# Altium PCB EHR.PcbDoc (part 1 of 4)
Units mm, origin at the board's own origin, x right, y up, seen from the top; angles counter-clockwise.
Board outline 200 x 110 mm, 2 copper layers (Top Layer, Bottom Layer), stack 1.646 mm thick; 17 components, 171 nets, 955 pads, 288 vias.
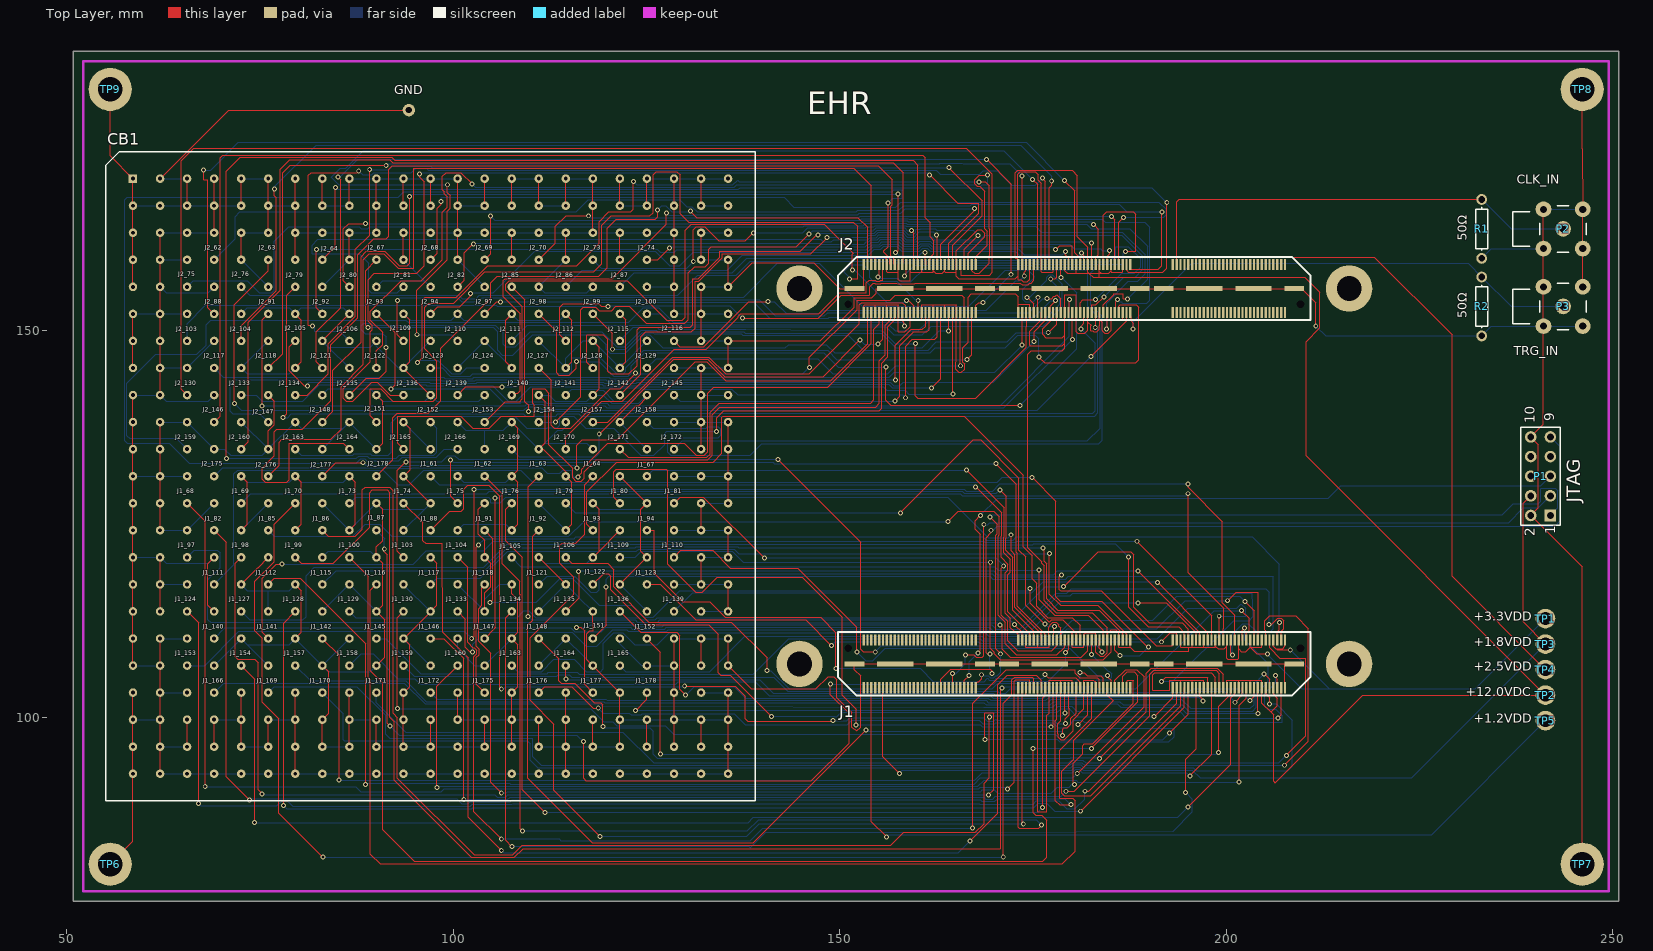
[diagram p0: Top Layer view]
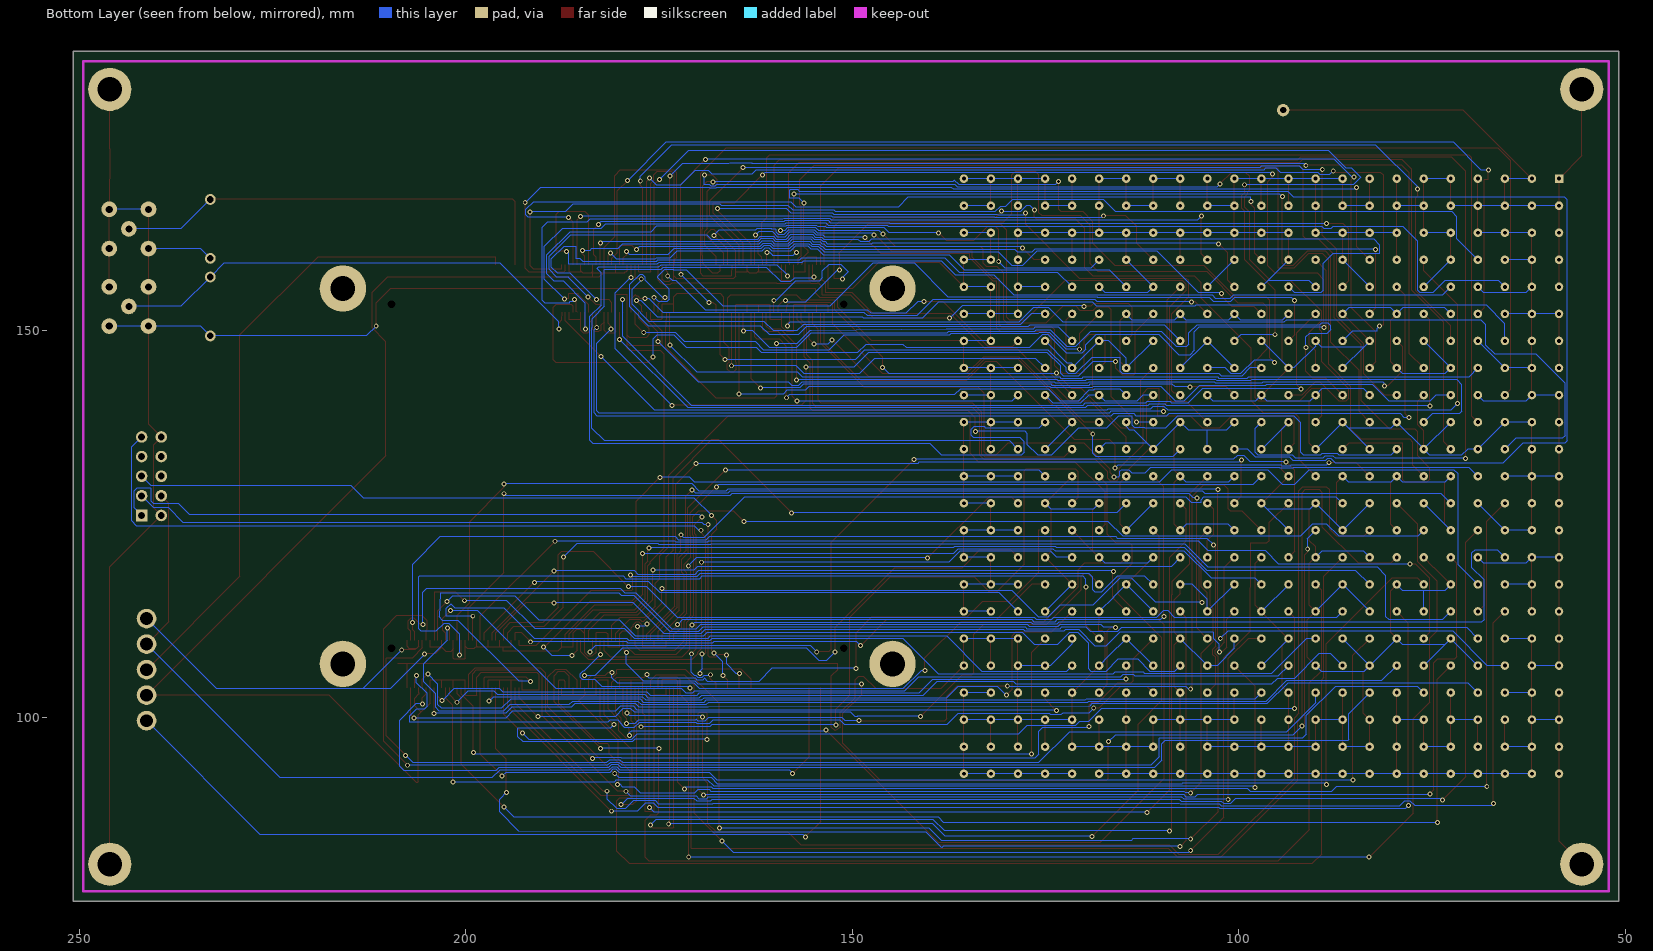
[diagram p1: Bottom Layer view, seen from below]

## Layer stack, top to bottom
Top Solder: solder mask 0.0102, Solder Resist, Dk 3.5
Top Layer: signal copper 0.0356
Dielectric 1: core 1.5748, FR-4, Dk 4.8
Bottom Layer: signal copper 0.0356
Bottom Solder: solder mask 0.0102, Solder Resist, Dk 3.5

## Board outline
50.8,76.2 250.8,76.2 250.8,186.2 50.8,186.2

## Design rules (kind name [scope] priority, off if disabled: settings)
Clearance [All] p1: gap=0.15
HoleSize [All] p1: absolutevalues=TRUE maxlimit=3.3 minlimit=0.3 maxpercent=80.000 minpercent=20.000
MinimumSolderMaskSliver MinimumSolderMaskSliver_QTH [HasFootprint('QTH-090-01-X-D-A') vs HasFootprint('QTH-090-01-X-D-A')] p1: minsoldermaskwidth=0.09
MinimumSolderMaskSliver [All] p2: minsoldermaskwidth=0.254
PolygonConnect [All] p1: connectstyle=Relief reliefconductorwidth=0.254 reliefentries=4 polygonreliefangle="90 Angle" airgapwidth=0.254
RoutingVias [All] p1: holewidth=0.39 width=0.64 viastyle="Through Hole" minholewidth=0.254 minwidth=0.508 maxholewidth=0.711 maxwidth=1.27
SilkToSolderMaskClearance SilkToSolderMaskClearance_QTH [HasFootprint('QTH-090-01-X-D-A') vs HasFootprint('QTH-090-01-X-D-A')] p1: minsilkscreentomaskgap=0.16 clearancetoexposedcopper=TRUE
SilkToSolderMaskClearance [IsPad] p2: minsilkscreentomaskgap=0.24 clearancetoexposedcopper=TRUE
SolderMaskExpansion [All] p1: expansion=0.1
UnpouredPolygon [All] p1: allowunpoured=FALSE
Width [All] p1: maxlimit=0.15 minlimit=0.15 preferedwidth=0.15
26 further rules are at their usual default settings.

## Components (designator, comment, footprint, x,y, rotation, side; value= is the part's Value field where it differs from the comment)
CB1 "Cables_529" EHR23x23_MR3.5 58.547,169.7 r0 top
J1 "QTH-090-01-X-D-A" QTH-090-01-X-D-A 180.34,106.915 r0 top
J2 "QTH-090-01-X-D-A" QTH-090-01-X-D-A 180.34,155.485 r180 top
P1 "Header 5X2" HDR2X5 241.935,126.12 r90 top
P2 "LEMO" LEMO_F 243.586,163.195 r0 top
P3 "LEMO" LEMO_F 243.586,153.162 r0 top
R1 "50Ω" AXIAL-0.3 233.045,163.195 r90 top
R2 "50Ω" AXIAL-0.3 233.045,153.162 r90 top
TP1 "Testpoint" Pad_mid 1504.569,1375.029 r0 top
TP2 "Testpoint" Pad_mid 1504.569,1365.123 r0 top
TP3 "Testpoint" Pad_mid 1504.569,1371.727 r0 top
TP4 "Testpoint" Pad_mid 1504.569,1368.425 r0 top
TP5 "Testpoint" Pad_mid 1504.569,1361.821 r0 top
TP6 "Testpoint M3" Testpoint_M3#1 1321.562,1348.486 r0 top
TP7 "Testpoint M3" Testpoint_M3#2 1502.918,1347.216 r0 top
TP8 "Testpoint M3" Testpoint_M3#3 1492.377,1441.958 r0 top
TP9 "Testpoint M3" Testpoint_M3#4 1326.515,1441.958 r0 top

## Footprints (in the part's own frame and the unit in brackets; to place one, negate y for a bottom-side part, rotate by r counter-clockwise, add the part's x,y. Pads: shape width x height; smd on the part's side, far side on the other; paste and mask are expansions set on the pad)
AXIAL-0.3 [mm] "Axial Device, Thru-Hole; 2 Leads; 0.3 in Pin Spacing"
  round 1.4 hole 0.85: 1(-3.81,0) 2(3.81,0)
  silkscreen extent -2.77,-0.76 2.77,0.76
EHR23x23_MR3.5 [mm]
  rect 1.1x1.1 hole 0.5: 1(0,0)
  round 1.1 hole 0.5: 2(3.5,0) 3(7,0) 4(10.5,0) 5(14,0) 6(17.5,0) 7(21,0) 8(24.5,0) 9(28,0) 10(31.5,0) 11(35,0) 12(38.5,0) 13(42,0) 14(45.5,0) 15(49,0) 16(52.5,0) 17(56,0) 18(59.5,0) 19(63,0) 20(66.5,0) 21(70,0) 22(73.5,0) 23(77,0) 24(0,-3.5) 25(3.5,-3.5) 26(7,-3.5) 27(10.5,-3.5) 28(14,-3.5) 29(17.5,-3.5) 30(21,-3.5) 31(24.5,-3.5) 32(28,-3.5) 33(31.5,-3.5) 34(35,-3.5) 35(38.5,-3.5) 36(42,-3.5) 37(45.5,-3.5) 38(49,-3.5) 39(52.5,-3.5) 40(56,-3.5) 41(59.5,-3.5) 42(63,-3.5) 43(66.5,-3.5) 44(70,-3.5) 45(73.5,-3.5) 46(77,-3.5) 47(0,-7) 48(3.5,-7) 49(7,-7) 50(10.5,-7) 51(14,-7) 52(17.5,-7) 53(21,-7) 54(24.5,-7) 55(28,-7) 56(31.5,-7) 57(35,-7) 58(38.5,-7) 59(42,-7) 60(45.5,-7) 61(49,-7) 62(52.5,-7) 63(56,-7) 64(59.5,-7) 65(63,-7) 66(66.5,-7) 67(70,-7) 68(73.5,-7) 69(77,-7) 70(0,-10.5) 71(3.5,-10.5) 72(7,-10.5) 73(10.5,-10.5) 74(14,-10.5) 75(17.5,-10.5) 76(21,-10.5) 77(24.5,-10.5) 78(28,-10.5) 79(31.5,-10.5) 80(35,-10.5) 81(38.5,-10.5) 82(42,-10.5) 83(45.5,-10.5) 84(49,-10.5) 85(52.5,-10.5) 86(56,-10.5) 87(59.5,-10.5) 88(63,-10.5) 89(66.5,-10.5) 90(70,-10.5) 91(73.5,-10.5) 92(77,-10.5) 93(0,-14) 94(3.5,-14) 95(7,-14) 96(10.5,-14) 97(14,-14) 98(17.5,-14) 99(21,-14) 100(24.5,-14) 101(28,-14) 102(31.5,-14) 103(35,-14) 104(38.5,-14) 105(42,-14) 106(45.5,-14) 107(49,-14) 108(52.5,-14) 109(56,-14) 110(59.5,-14) 111(63,-14) 112(66.5,-14) 113(70,-14) 114(73.5,-14) 115(77,-14) 116(0,-17.5) 117(3.5,-17.5) 118(7,-17.5) 119(10.5,-17.5) 120(14,-17.5) 121(17.5,-17.5) 122(21,-17.5) 123(24.5,-17.5) 124(28,-17.5) 125(31.5,-17.5) 126(35,-17.5) 127(38.5,-17.5) 128(42,-17.5) 129(45.5,-17.5) 130(49,-17.5) 131(52.5,-17.5) 132(56,-17.5) 133(59.5,-17.5) 134(63,-17.5) 135(66.5,-17.5) 136(70,-17.5) 137(73.5,-17.5) 138(77,-17.5) 139(0,-21) 140(3.5,-21) 141(7,-21) 142(10.5,-21) 143(14,-21) 144(17.5,-21) 145(21,-21) 146(24.5,-21) 147(28,-21) 148(31.5,-21) 149(35,-21) 150(38.5,-21) 151(42,-21) 152(45.5,-21) 153(49,-21) 154(52.5,-21) 155(56,-21) 156(59.5,-21) 157(63,-21) 158(66.5,-21) 159(70,-21) 160(73.5,-21) 161(77,-21) 162(0,-24.5) 163(3.5,-24.5) 164(7,-24.5) 165(10.5,-24.5) 166(14,-24.5) 167(17.5,-24.5) 168(21,-24.5) 169(24.5,-24.5) 170(28,-24.5) 171(31.5,-24.5) 172(35,-24.5) 173(38.5,-24.5) 174(42,-24.5) 175(45.5,-24.5) 176(49,-24.5) 177(52.5,-24.5) 178(56,-24.5) 179(59.5,-24.5) 180(63,-24.5) 181(66.5,-24.5) 182(70,-24.5) 183(73.5,-24.5) 184(77,-24.5) 185(0,-28) 186(3.5,-28) 187(7,-28) 188(10.5,-28) 189(14,-28) 190(17.5,-28) 191(21,-28) 192(24.5,-28) 193(28,-28) 194(31.5,-28) 195(35,-28) 196(38.5,-28) 197(42,-28) 198(45.5,-28) 199(49,-28) 200(52.5,-28) 201(56,-28) 202(59.5,-28) 203(63,-28) 204(66.5,-28) 205(70,-28) 206(73.5,-28) 207(77,-28) 208(0,-31.5) 209(3.5,-31.5) 210(7,-31.5) 211(10.5,-31.5) 212(14,-31.5) 213(17.5,-31.5) 214(21,-31.5) 215(24.5,-31.5) 216(28,-31.5) 217(31.5,-31.5) 218(35,-31.5) 219(38.5,-31.5) 220(42,-31.5) 221(45.5,-31.5) 222(49,-31.5) 223(52.5,-31.5) 224(56,-31.5) 225(59.5,-31.5) 226(63,-31.5) 227(66.5,-31.5) 228(70,-31.5) 229(73.5,-31.5) 230(77,-31.5) 231(0,-35) 232(3.5,-35) 233(7,-35) 234(10.5,-35) 235(14,-35) 236(17.5,-35) 237(21,-35) 238(24.5,-35) 239(28,-35) 240(31.5,-35) 241(35,-35) 242(38.5,-35) 243(42,-35) 244(45.5,-35) 245(49,-35) 246(52.5,-35) 247(56,-35) 248(59.5,-35) 249(63,-35) 250(66.5,-35) 251(70,-35) 252(73.5,-35) 253(77,-35) 254(0,-38.5) 255(3.5,-38.5) 256(7,-38.5) 257(10.5,-38.5) 258(14,-38.5) 259(17.5,-38.5) 260(21,-38.5) 261(24.5,-38.5) 262(28,-38.5) 263(31.5,-38.5) 264(35,-38.5) 265(38.5,-38.5) 266(42,-38.5) 267(45.5,-38.5) 268(49,-38.5) 269(52.5,-38.5) 270(56,-38.5) 271(59.5,-38.5) 272(63,-38.5) 273(66.5,-38.5) 274(70,-38.5) 275(73.5,-38.5) 276(77,-38.5) 277(0,-42) 278(3.5,-42) 279(7,-42) 280(10.5,-42) 281(14,-42) 282(17.5,-42) 283(21,-42) 284(24.5,-42) 285(28,-42) 286(31.5,-42) 287(35,-42) 288(38.5,-42) 289(42,-42) 290(45.5,-42) 291(49,-42) 292(52.5,-42) 293(56,-42) 294(59.5,-42) 295(63,-42) 296(66.5,-42) 297(70,-42) 298(73.5,-42) 299(77,-42) 300(0,-45.5) 301(3.5,-45.5) 302(7,-45.5) 303(10.5,-45.5) 304(14,-45.5) 305(17.5,-45.5) 306(21,-45.5) 307(24.5,-45.5) 308(28,-45.5) 309(31.5,-45.5) 310(35,-45.5) 311(38.5,-45.5) 312(42,-45.5) 313(45.5,-45.5) 314(49,-45.5) 315(52.5,-45.5) 316(56,-45.5) 317(59.5,-45.5) 318(63,-45.5) 319(66.5,-45.5) 320(70,-45.5) 321(73.5,-45.5) 322(77,-45.5) 323(0,-49) 324(3.5,-49) 325(7,-49) 326(10.5,-49) 327(14,-49) 328(17.5,-49) 329(21,-49) 330(24.5,-49) 331(28,-49) 332(31.5,-49) 333(35,-49) 334(38.5,-49) 335(42,-49) 336(45.5,-49) 337(49,-49) 338(52.5,-49) 339(56,-49) 340(59.5,-49) 341(63,-49) 342(66.5,-49) 343(70,-49) 344(73.5,-49) 345(77,-49) 346(0,-52.5) 347(3.5,-52.5) 348(7,-52.5) 349(10.5,-52.5) 350(14,-52.5) 351(17.5,-52.5) 352(21,-52.5) 353(24.5,-52.5) 354(28,-52.5) 355(31.5,-52.5) 356(35,-52.5) 357(38.5,-52.5) 358(42,-52.5) 359(45.5,-52.5) 360(49,-52.5) 361(52.5,-52.5) 362(56,-52.5) 363(59.5,-52.5) 364(63,-52.5) 365(66.5,-52.5) 366(70,-52.5) 367(73.5,-52.5) 368(77,-52.5) 369(0,-56) 370(3.5,-56) 371(7,-56) 372(10.5,-56) 373(14,-56) 374(17.5,-56) 375(21,-56) 376(24.5,-56) 377(28,-56) 378(31.5,-56) 379(35,-56) 380(38.5,-56) 381(42,-56) 382(45.5,-56) 383(49,-56) 384(52.5,-56) 385(56,-56) 386(59.5,-56) 387(63,-56) 388(66.5,-56) 389(70,-56) 390(73.5,-56) 391(77,-56) 392(0,-59.5) 393(3.5,-59.5) 394(7,-59.5) 395(10.5,-59.5) 396(14,-59.5) 397(17.5,-59.5) 398(21,-59.5) 399(24.5,-59.5) 400(28,-59.5) 401(31.5,-59.5) 402(35,-59.5) 403(38.5,-59.5) 404(42,-59.5) 405(45.5,-59.5) 406(49,-59.5) 407(52.5,-59.5) 408(56,-59.5) 409(59.5,-59.5) 410(63,-59.5) 411(66.5,-59.5) 412(70,-59.5) 413(73.5,-59.5) 414(77,-59.5) 415(0,-63) 416(3.5,-63) 417(7,-63) 418(10.5,-63) 419(14,-63) 420(17.5,-63) 421(21,-63) 422(24.5,-63) 423(28,-63) 424(31.5,-63) 425(35,-63) 426(38.5,-63) 427(42,-63) 428(45.5,-63) 429(49,-63) 430(52.5,-63) 431(56,-63) 432(59.5,-63) 433(63,-63) 434(66.5,-63) 435(70,-63) 436(73.5,-63) 437(77,-63) 438(0,-66.5) 439(3.5,-66.5) 440(7,-66.5) 441(10.5,-66.5) 442(14,-66.5) 443(17.5,-66.5) 444(21,-66.5) 445(24.5,-66.5) 446(28,-66.5) 447(31.5,-66.5) 448(35,-66.5) 449(38.5,-66.5) 450(42,-66.5) 451(45.5,-66.5) 452(49,-66.5) 453(52.5,-66.5) 454(56,-66.5) 455(59.5,-66.5) 456(63,-66.5) 457(66.5,-66.5) 458(70,-66.5) 459(73.5,-66.5) 460(77,-66.5) 461(0,-70) 462(3.5,-70) 463(7,-70) 464(10.5,-70) 465(14,-70) 466(17.5,-70) 467(21,-70) 468(24.5,-70) 469(28,-70) 470(31.5,-70) 471(35,-70) 472(38.5,-70) 473(42,-70) 474(45.5,-70) 475(49,-70) 476(52.5,-70) 477(56,-70) 478(59.5,-70) 479(63,-70) 480(66.5,-70) 481(70,-70) 482(73.5,-70) 483(77,-70) 484(0,-73.5) 485(3.5,-73.5) 486(7,-73.5) 487(10.5,-73.5) 488(14,-73.5) 489(17.5,-73.5) 490(21,-73.5) 491(24.5,-73.5) 492(28,-73.5) 493(31.5,-73.5) 494(35,-73.5) 495(38.5,-73.5) 496(42,-73.5) 497(45.5,-73.5) 498(49,-73.5) 499(52.5,-73.5) 500(56,-73.5) 501(59.5,-73.5) 502(63,-73.5) 503(66.5,-73.5) 504(70,-73.5) 505(73.5,-73.5) 506(77,-73.5) 507(0,-77) 508(3.5,-77) 509(7,-77) 510(10.5,-77) 511(14,-77) 512(17.5,-77) 513(21,-77) 514(24.5,-77) 515(28,-77) 516(31.5,-77) 517(35,-77) 518(38.5,-77) 519(42,-77) 520(45.5,-77) 521(49,-77) 522(52.5,-77) 523(56,-77) 524(59.5,-77) 525(63,-77) 526(66.5,-77) 527(70,-77) 528(73.5,-77) 529(77,-77)
  silkscreen extent -3.5,-80.5 80.5,3.5
HDR2X5 [mm] "Connector; Header; 5x2 Position"
  rect 1.5x1.5 hole 0.9: 1(0,0)
  round 1.5 hole 0.9: 2(0,2.54) 3(2.54,0) 4(2.54,2.54) 5(5.08,0) 6(5.08,2.54) 7(7.62,0) 8(7.62,2.54) 9(10.16,0) 10(10.16,2.54)
  silkscreen extent -1.27,-1.27 11.43,3.81
LEMO_F [mil] "Connector; RF Coaxial, LEMO, Thru-Hole; 5 Position; Right-Angle"
  round 80 hole 36: 1(0,0) 2(-100,-100) 3(100,-100) 4(100,100) 5(-100,100)
  silkscreen extent -256,-118 118,118
Pad_mid [mil]
  round 100 hole 65: 1(-49735,-49695)
QTH-090-01-X-D-A [mil]
  rect 12x57 smd mask+2: 1(-1073.15,121.5) 2(-1073.15,-121.5) 3(-1053.45,121.5) 4(-1053.45,-121.5) 5(-1033.75,121.5) 6(-1033.75,-121.5) 7(-1014.05,121.5) 8(-1014.05,-121.5) 9(-994.35,121.5) 10(-994.35,-121.5) 11(-974.65,121.5) 12(-974.65,-121.5) 13(-954.95,121.5) 14(-954.95,-121.5) 15(-935.25,121.5) 16(-935.25,-121.5) 17(-915.55,121.5) 18(-915.55,-121.5) 19(-895.85,121.5) 20(-895.85,-121.5) 21(-876.15,121.5) 22(-876.15,-121.5) 23(-856.45,121.5) 24(-856.45,-121.5) 25(-836.75,121.5) 26(-836.75,-121.5) 27(-817.05,121.5) 28(-817.05,-121.5) 29(-797.35,121.5) 30(-797.35,-121.5) 31(-777.65,121.5) 32(-777.65,-121.5) 33(-757.95,121.5) 34(-757.95,-121.5) 35(-738.25,121.5) 36(-738.25,-121.5) 37(-718.55,121.5) 38(-718.55,-121.5) 39(-698.85,121.5) 40(-698.85,-121.5) 41(-679.15,121.5) 42(-679.15,-121.5) 43(-659.45,121.5) 44(-659.45,-121.5) 45(-639.75,121.5) 46(-639.75,-121.5) 47(-620.05,121.5) 48(-620.05,-121.5) 49(-600.35,121.5) 50(-600.35,-121.5) 51(-580.65,121.5) 52(-580.65,-121.5) 53(-560.95,121.5) 54(-560.95,-121.5) 55(-541.25,121.5) 56(-541.25,-121.5) 57(-521.55,121.5) 58(-521.55,-121.5) 59(-501.85,121.5) 60(-501.85,-121.5) 61(-285.65,121.5) 62(-285.65,-121.5) 63(-265.95,121.5) 64(-265.95,-121.5) 65(-246.25,121.5) 66(-246.25,-121.5) 67(-226.55,121.5) 68(-226.55,-121.5) 69(-206.85,121.5) 70(-206.85,-121.5) 71(-187.15,121.5) 72(-187.15,-121.5) 73(-167.45,121.5) 74(-167.45,-121.5) 75(-147.75,121.5) 76(-147.75,-121.5) 77(-128.05,121.5) 78(-128.05,-121.5) 79(-108.35,121.5) 80(-108.35,-121.5) 81(-88.65,121.5) 82(-88.65,-121.5) 83(-68.95,121.5) 84(-68.95,-121.5) 85(-49.25,121.5) 86(-49.25,-121.5) 87(-29.55,121.5) 88(-29.55,-121.5) 89(-9.85,121.5) 90(-9.85,-121.5) 91(9.85,121.5) 92(9.85,-121.5) 93(29.55,121.5) 94(29.55,-121.5) 95(49.25,121.5) 96(49.25,-121.5) 97(68.95,121.5) 98(68.95,-121.5) 99(88.65,121.5) 100(88.65,-121.5) 101(108.35,121.5) 102(108.35,-121.5) 103(128.05,121.5) 104(128.05,-121.5) 105(147.75,121.5) 106(147.75,-121.5) 107(167.45,121.5) 108(167.45,-121.5) 109(187.15,121.5) 110(187.15,-121.5) 111(206.85,121.5) 112(206.85,-121.5) 113(226.55,121.5) 114(226.55,-121.5) 115(246.25,121.5) 116(246.25,-121.5) 117(265.95,121.5) 118(265.95,-121.5) 119(285.65,121.5) 120(285.65,-121.5) 121(501.85,121.5) 122(501.85,-121.5) 123(521.55,121.5) 124(521.55,-121.5) 125(541.25,121.5) 126(541.25,-121.5) 127(560.95,121.5) 128(560.95,-121.5) 129(580.65,121.5) 130(580.65,-121.5) 131(600.35,121.5) 132(600.35,-121.5) 133(620.05,121.5) 134(620.05,-121.5) 135(639.75,121.5) 136(639.75,-121.5) 137(659.45,121.5) 138(659.45,-121.5) 139(679.15,121.5) 140(679.15,-121.5) 141(698.85,121.5) 142(698.85,-121.5) 143(718.55,121.5) 144(718.55,-121.5) 145(738.25,121.5) 146(738.25,-121.5) 147(757.95,121.5) 148(757.95,-121.5) 149(777.65,121.5) 150(777.65,-121.5) 151(797.35,121.5) 152(797.35,-121.5) 153(817.05,121.5) 154(817.05,-121.5) 155(836.75,121.5) 156(836.75,-121.5) 157(856.45,121.5) 158(856.45,-121.5) 159(876.15,121.5) 160(876.15,-121.5) 161(895.85,121.5) 162(895.85,-121.5) 163(915.55,121.5) 164(915.55,-121.5) 165(935.25,121.5) 166(935.25,-121.5) 167(954.95,121.5) 168(954.95,-121.5) 169(974.65,121.5) 170(974.65,-121.5) 171(994.35,121.5) 172(994.35,-121.5) 173(1014.05,121.5) 174(1014.05,-121.5) 175(1033.75,121.5) 176(1033.75,-121.5) 177(1053.45,121.5) 178(1053.45,-121.5) 179(1073.15,121.5) 180(1073.15,-121.5)
  rect 100x25 smd mask+2: 181(-1120,0) 184(-455,0) 185(-332.5,0) 188(332.5,0) 189(455,0) 192(1120,0)
  rect 185x25 smd mask+2: 182(-912.5,0) 183(-662.5,0) 186(-125,0) 187(125,0) 190(662.5,0) 191(912.5,0)
  round 0 hole 40 unplated: 193(-1151.5,80) 194(1151.5,80)
  silkscreen extent -1203,-161 1203,161
Testpoint_M3#1 [mil]
  round 220 hole 126: 0(-49841.02,-49901.02)
Testpoint_M3#2 [mil]
  round 220 hole 126: 0(-49482.99,-49851.02)
Testpoint_M3#3 [mil]
  round 220 hole 126: 0(-49067.99,-49634.17)
Testpoint_M3#4 [mil]
  round 220 hole 126: 0(-50036.02,-49634.17)

## Part data
J1 J2: "HIGH SPEED TERMINAL STRIP, .5mm PITCH, 180 PINS."
P1: "Header, 5-Pin, Dual row"
R1 R2: library part Res1, "Resistor"
TP1 TP2 TP3 TP4 TP5: library part Pad_med, "Testpoint middle"
TP6 TP7 TP8 TP9: library part Pad_M3

## Free pads (board coordinates)
  round 1.6 hole 0.8: 0(94.234,178.562)
  round 6 hole 3.2: 0(144.78,155.485) 1(215.9,155.485) 2(144.78,106.915) 3(215.9,106.915)

## Via types
v1: diameter 0.64, hole 0.39, Top Layer to Bottom Layer, 288 vias

## Nets (pads, with @x,y where several pads share a name; then routed paths per layer and width w, separated by ;. In a path a pad name is that pad's centre, name@x,y a point inside that pad or via, vN(x,y) a via of type N, cw(c..) or ccw(c..) an arc to the next point about the centre after c; other vN are vias at no path point)
+1.2VDD: J1.6 TP5.1 | length 111.6
  Top Layer w0.15: J1.6@154.083,103.829 154.083,86.506 v1(156.058,84.531)
  Bottom Layer w0.15: v1(156.058,84.531) 156.348,84.822 168.351,84.822 226.568,84.836 TP5.1@241.3,99.568
+1.8VDD: J1.12 P1.4 TP3.1 | length 124.4
  Top Layer w0.15: J1.12@155.584,103.829 155.584,94.886 v1(157.709,92.761) ; P1.4@239.395,128.66 238.404,127.669 238.404,112.37 TP3.1@241.3,109.474
  Bottom Layer w0.15: v1(157.709,92.761) 158.109,93.161 179.977,93.161 180.371,93.555 181.071,93.555 181.465,93.161 195.631,93.161 196.616,92.177 224.003,92.177 TP3.1@241.3,109.474
+2.5VDD: J2.48 TP4.1 | length 86.6
  Top Layer w0.15: J2.48@196.089,158.571 196.089,159.512 196.115,159.537 219.177,159.537 229.21,149.504 229.21,118.262 TP4.1@241.3,106.172
+3.3VDD: J1.65 J1.71 J1.77 J1.83 J1.89 J1.95 J1.101 J1.107 J1.113 J1.119 J1.125 J1.131 J1.137 J1.143 J1.149 J1.155 J1.161 J1.167 J1.173 J1.179 J2.65 J2.71 J2.77 J2.83 J2.89 J2.95 J2.101 J2.107 J2.113 J2.119 J2.125 J2.131 J2.137 J2.143 J2.149 J2.155 J2.161 J2.167 J2.173 J2.179 TP1.1 | length 273
  Top Layer w0.15: J2.179@153.082,152.399 153.082,153.226 153.221,153.365 154.558,153.365 154.583,153.34 154.583,153.336 ; J2.173@154.583,152.399 154.583,153.336 ; J2.167@156.084,152.399 156.084,153.34 156.107,153.362 ; J2.155@159.087,152.399 159.087,151.46 ; J2.143@162.089,152.399 162.089,153.34 ; J2.137@163.59,152.399 163.59,153.34 163.565,153.365 ; J2.119@173.084,152.399 173.084,153.441 ; J1.65@174.085,110.001 174.085,109.068 174.111,109.042 175.561,109.042 175.586,109.068 ; J1.71@175.586,110.001 175.586,109.068 ; J2.107@176.087,152.399 176.087,151.486 ; J2.101@177.588,152.399 177.588,151.638 176.253,150.303 176.253,149.542 176.666,149.13 178.765,149.13 179.089,149.454 ; J1.83@178.589,110.001 178.589,110.807 ; J2.83@182.091,152.399 182.091,151.133 ; J2.77@183.592,152.399 183.592,151.471 ; J2.71@185.094,152.399 185.094,151.46 185.119,151.435 ; J2.65@186.595,152.399 186.595,151.46 186.569,151.435 185.119,151.435 ; J1.119@187.596,110.001 187.596,109.093 ; J1.125@194.088,110.001 194.088,109.068 194.113,109.042 195.12,109.042 ; J1.131@195.589,110.001 195.589,109.068 ; J1.137@197.09,110.001 197.09,109.068 ; J1.143@198.591,110.001 198.591,109.22 ; J1.149@200.092,110.001 200.092,109.22 ; J1.155@201.593,110.001 201.593,108.843 ; J1.161@203.095,110.001 203.095,109.068 ; J1.167@204.596,110.001 204.596,109.068 204.57,109.042 203.12,109.042 ; v1(205.359,108.204) 203.962,108.204 203.96,108.202 203.12,109.042 ; J1.173@206.097,110.001 206.097,109.22 206.414,108.902 ; J1.179@207.598,110.001 207.598,109.22 207.281,108.902 206.414,108.902 ; v1(208.28,108.737) 206.579,108.737 206.414,108.902 ; 154.583,153.336 154.61,153.362 156.107,153.362 ; 156.107,153.362 156.11,153.365 157.56,153.365 157.585,153.34 157.585,153.333 ; 156.107,153.362 157.556,153.362 157.585,153.333 ; 157.585,153.333 157.585,149.882 157.607,149.86 158.407,149.86 159.087,150.539 159.087,151.46 ; 159.087,151.46 159.112,151.435 160.562,151.435 160.588,151.46 160.588,153.34 160.613,153.365 162.063,153.365 ; 162.063,153.365 162.089,153.34 ; 162.063,153.365 162.114,153.365 ; 162.089,153.34 162.114,153.365 ; 162.114,153.365 163.565,153.365 ; 163.565,153.365 165.066,153.365 165.091,153.34 165.091,146.914 165.024,145.047 165.417,144.653 165.735,144.653 166.141,145.059 166.141,145.72 165.901,145.96 165.901,147.828 166.592,148.519 166.592,154.375 167.005,154.788 172.72,154.788 173.084,154.423 173.084,153.441 ; 173.084,153.441 173.11,153.467 174.56,153.467 174.586,153.441 174.586,151.65 174.79,151.446 176.048,151.446 176.087,151.486 ; 175.586,109.068 175.612,109.042 177.062,109.042 177.088,109.068 J1.77@177.088,110.001 177.088,110.205 177.019,110.274 177.019,111.684 177.255,111.92 177.255,111.986 177.574,112.305 178.026,112.305 178.345,111.986 178.345,111.811 178.589,111.567 178.589,110.807 ; 176.087,151.486 176.087,151.435 174.574,149.922 174.574,148.12 174.6,148.095 178.752,148.095 179.089,148.431 ; 178.589,110.807 178.906,111.125 179.772,111.125 180.09,110.807 J1.89@180.09,110.001 180.09,109.068 180.115,109.042 181.566,109.042 181.591,109.068 J1.95@181.591,110.001 181.591,110.744 181.797,110.95 183.064,110.95 183.092,110.922 J1.101@183.092,110.001 183.137,109.956 183.137,108.447 183.67,107.913 184.122,107.913 184.593,108.384 J1.107@184.593,110.001 184.593,110.819 ; 179.089,148.431 179.089,147.758 178.752,147.422 174.739,147.422 174.32,147.002 174.32,121.971 176.135,120.156 176.135,119.912 176.453,119.595 176.453,115.082 178.029,113.505 182.684,113.505 184.593,111.596 184.593,110.819 ; 179.089,148.431 179.089,149.454 ; 179.089,149.454 179.089,154.667 179.074,154.682 180.59,154.682 180.59,149.864 180.758,149.696 181.697,149.696 182.053,150.052 182.053,150.66 182.091,150.698 182.091,151.133 ; 182.091,151.133 182.513,150.712 182.499,150.698 182.499,149.987 182.739,149.987 182.824,149.902 183.275,149.902 183.595,150.221 183.595,150.673 183.566,150.701 183.566,150.712 183.603,150.749 183.603,151.45 ; 183.592,151.471 183.603,151.46 183.603,151.45 ; 183.592,151.471 183.592,151.46 183.603,151.45 ; 183.603,151.45 183.947,151.106 183.947,150.071 183.943,150.067 183.986,150.024 183.986,150.015 184.305,149.696 184.757,149.696 185.119,150.058 185.119,151.435 ; 184.593,110.819 185.102,111.328 185.682,111.328 186.094,110.915 J1.113@186.094,110.001 186.094,109.068 186.12,109.042 187.545,109.042 187.596,109.093 ; 187.596,109.093 188.115,108.573 195.12,108.573 195.12,109.042 ; 195.12,109.042 195.589,109.068 ; 195.12,109.042 195.563,109.042 195.589,109.068 ; 195.589,109.068 195.614,109.042 197.065,109.042 197.09,109.068 ; 197.09,109.068 197.115,109.042 198.566,109.042 198.591,109.068 198.591,109.22 ; 198.591,109.22 198.947,108.864 199.737,108.864 200.092,109.22 ; 200.092,109.22 200.092,107.629 200.189,107.532 201.512,107.532 201.593,107.613 201.593,108.843 ; 201.593,108.843 201.93,108.506 202.533,108.506 203.095,109.068 ; 203.095,109.068 203.12,109.042
  Bottom Layer w0.15: v1(205.359,108.204) 205.359,108.102 209.779,103.683 213.335,103.683 ; v1(208.28,108.737) 213.335,103.683 ; TP1.1@241.3,112.776 232.207,103.683 213.335,103.683
+12.0VDC: J1.66 J1.72 J1.78 J1.84 J1.90 J1.96 J1.102 J1.108 J1.114 J1.120 J1.126 J1.132 J1.138 J1.144 J1.150 J1.156 J1.162 J1.168 J1.174 J2.66 J2.72 J2.78 J2.84 J2.90 J2.96 J2.102 J2.108 J2.114 J2.120 J2.126 J2.132 J2.138 J2.144 J2.150 J2.156 J2.162 J2.168 J2.174 TP2.1 | length 419.4
  Top Layer w0.15: J2.174@154.583,158.571 154.583,159.512 154.609,159.537 155.812,159.537 156.084,159.265 156.084,157.632 156.11,157.607 157.56,157.607 157.585,157.632 ; J2.162@157.585,158.571 157.585,157.632 ; J2.156@159.087,158.571 159.087,157.638 ; J2.150@160.588,158.571 160.588,157.632 ; J2.144@162.089,158.571 162.089,157.797 ; J2.138@163.59,158.571 163.59,157.797 ; J2.126@166.592,158.571 166.592,160.02 168.778,162.206 168.778,162.616 168.275,163.119 167.818,163.119 165.091,160.392 165.091,157.632 ; J1.66@174.085,103.829 174.085,102.895 174.111,102.87 175.561,102.87 175.586,102.895 ; J2.114@174.586,158.571 174.586,156.63 174.546,156.591 174.498,156.591 174.244,156.337 173.736,156.337 173.482,156.591 173.109,156.591 173.084,156.616 173.084,157.133 ; J1.72@175.586,103.829 175.586,102.895 ; J2.102@177.588,158.571 177.588,157.632 177.563,157.607 176.112,157.607 176.087,157.632 176.087,169.075 175.667,169.494 175.667,170.18 175.261,170.586 173.355,170.586 173.025,170.256 J2.120@172.996,159.22 ; J2.96@179.089,158.571 179.089,157.791 179.273,157.607 179.4,157.607 179.4,157.48 180.59,157.48 ; J1.90@180.09,103.829 180.09,104.775 180.064,104.8 178.614,104.8 ; J2.90@180.59,158.571 180.59,157.48 ; 181.591,104.8 J1.96@181.591,103.829 181.591,101.097 180.186,99.692 180.186,98.262 179.042,97.118 178.59,97.118 178.271,97.437 178.271,97.803 178.195,97.879 178.195,99.187 178.589,99.581 J1.84@178.589,103.829 178.589,104.775 178.614,104.8 ; 181.592,104.801 182.814,104.801 182.969,104.646 183.092,104.646 J1.102@183.092,103.829 183.092,102.895 183.117,102.87 184.568,102.87 ; J2.78@183.592,158.571 183.592,157.632 ; J1.108@184.593,103.829 184.568,102.87 ; J2.72@185.094,158.571 185.094,157.797 ; J1.114@186.094,103.829 186.094,102.87 186.077,102.852 ; J2.66@186.595,158.571 186.595,157.632 186.569,157.607 185.119,157.607 185.094,157.632 185.094,157.797 ; J1.120@187.596,103.829 187.569,102.844 186.077,102.852 ; J1.132@195.589,103.829 195.589,104.775 ; 197.067,104.798 197.09,104.775 ; J1.138@197.09,103.829 197.09,104.775 ; J1.156@201.593,103.829 201.593,104.775 ; J1.162@203.095,103.829 203.095,104.775 ; J1.174@206.097,103.829 206.097,103.199 206.112,102.997 206.121,102.997 206.629,102.489 206.629,101.473 205.848,100.692 205.75,100.692 ; 157.585,157.632 157.585,156.613 157.734,156.464 159.131,156.464 159.092,156.503 159.092,157.627 ; 159.087,157.638 159.092,157.632 159.092,157.627 ; 159.087,157.638 159.087,157.632 159.092,157.627 ; 159.092,157.627 159.112,157.607 160.562,157.607 160.588,157.632 ; 160.588,157.632 160.613,157.607 162.063,157.607 162.089,157.632 162.089,157.797 ; 162.089,157.797 162.406,157.48 163.272,157.48 163.59,157.797 ; 163.59,157.797 163.59,157.632 163.615,157.607 165.066,157.607 165.091,157.632 ; 165.091,157.632 165.091,157.095 165.417,156.769 172.72,156.769 173.084,157.133 ; J2.120@172.996,159.22 J2.120@173.084,158.571 ; J2.120@172.996,159.22 172.72,159.495 172.72,170.459 173.037,170.777 180.048,170.777 180.721,170.104 180.721,162.174 182.091,160.803 182.091,157.607 182.218,157.48 ; J2.120@172.996,159.22 173.084,159.131 J2.120@173.084,158.571 ; 173.084,157.133 J2.120@173.084,158.571 ; 175.586,102.895 175.586,87.808 175.612,87.782 176.772,87.782 176.798,87.808 176.798,100.243 177.088,100.533 J1.78@177.088,103.829 177.088,104.775 177.113,104.8 178.614,104.8 ; 180.59,157.48 182.218,157.48 ; 182.218,157.48 183.592,157.48 ; 182.218,157.48 182.777,156.921 183.592,156.921 ; 183.592,156.921 183.592,157.48 ; 183.592,156.921 210.185,156.921 212.127,154.979 212.127,150.396 210.337,148.607 210.337,133.833 TP2.1@241.3,102.87 217.645,102.87 206.342,91.567 206.291,91.567 206.121,91.737 206.121,100.33 206.112,100.33 205.75,100.692 ; 183.592,157.48 183.91,157.48 ; 183.592,157.48 183.592,157.632 ; 183.592,157.632 183.91,157.48 ; 183.91,157.48 184.776,157.48 185.094,157.797 ; 184.568,102.87 184.577,102.861 ; 184.577,102.861 186.077,102.852 ; 184.577,102.861 185.356,102.132 180.289,97.065 180.289,94.603 178.728,93.042 178.728,90.202 179.07,89.86 182.469,89.86 194.088,101.479 J1.126@194.088,103.829 194.088,104.775 ; 194.088,104.775 193.836,104.775 193.833,104.778 192.662,104.778 192.659,104.775 192.659,103.505 190.5,103.505 190.5,105.537 190.736,105.773 198.037,105.773 198.591,105.218 J1.144@198.591,103.829 198.591,102.845 198.627,102.809 199.949,102.809 200.092,102.952 J1.150@200.092,103.829 200.092,104.775 200.118,104.8 201.568,104.8 201.593,104.775 ; 194.088,104.775 194.34,104.775 194.343,104.778 195.586,104.778 195.589,104.775 ; 195.589,104.775 195.614,104.8 197.065,104.8 197.09,104.775 ; 201.593,104.775 201.619,104.8 203.069,104.8 203.095,104.775 ; 203.095,104.775 203.12,104.8 204.57,104.8 204.596,104.775 J1.168@204.596,103.829 204.596,102.895 204.597,102.894 204.597,101.845 205.75,100.692
CLKIN0: J2.58 P2.1 R1.2 | length 59.8
  Top Layer w0.15: J2.58@193.587,158.571 193.587,166.688 193.905,167.005 R1.2@233.045,167.005
  Bottom Layer w0.15: R1.2@233.045,167.005 236.855,163.195 P2.1@243.586,163.195